# Altium PCB PCB_V0_23_08_01.PcbDoc
Units mm, origin at the board's own origin, x right, y up, seen from the top; angles counter-clockwise.
Board outline 55.24 x 30.1 mm, 2 copper layers (Top Layer, Bottom Layer); 11 components, 6 nets, 90 pads, 0 vias.
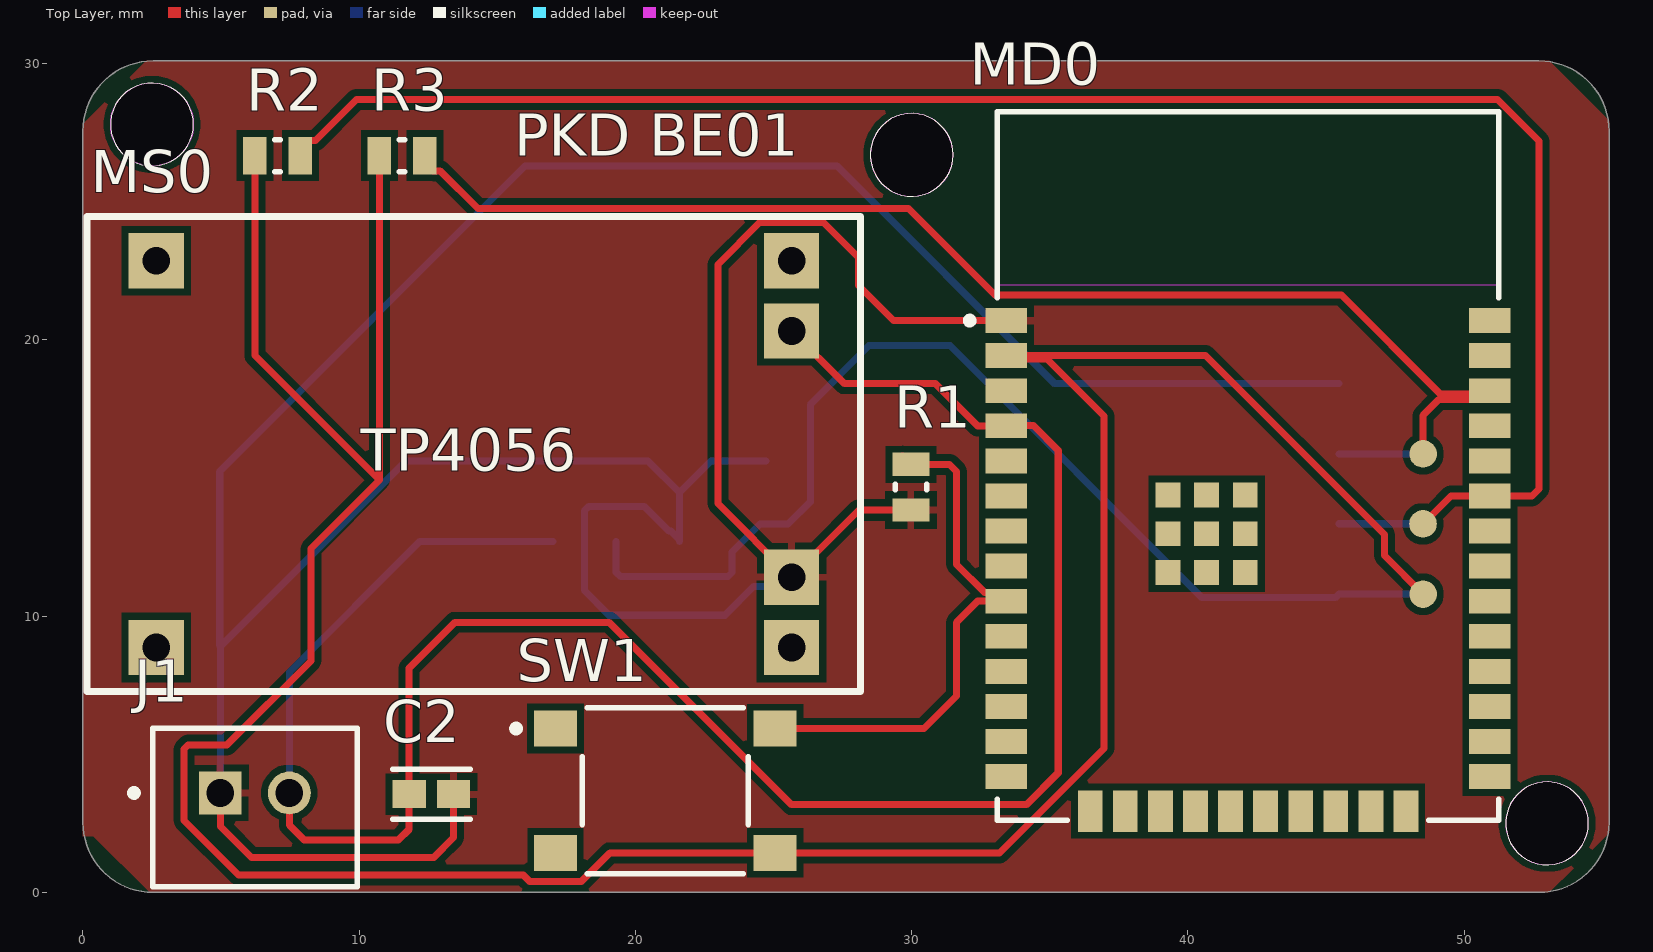
[diagram p0: Top Layer view]
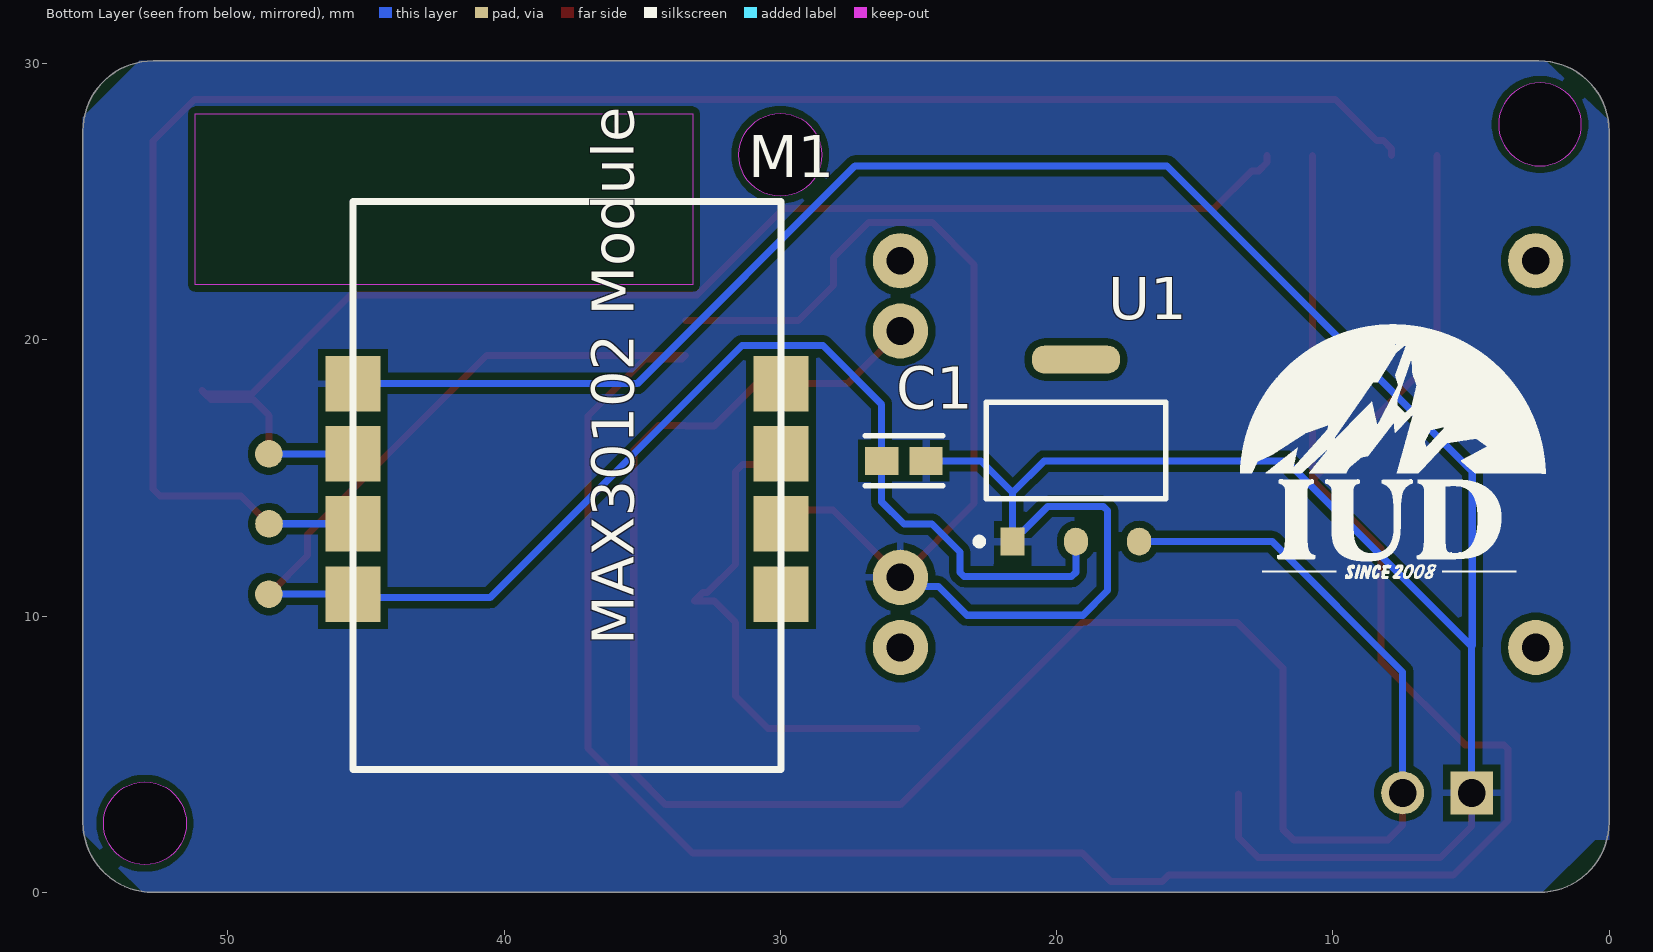
[diagram p1: Bottom Layer view, seen from below]
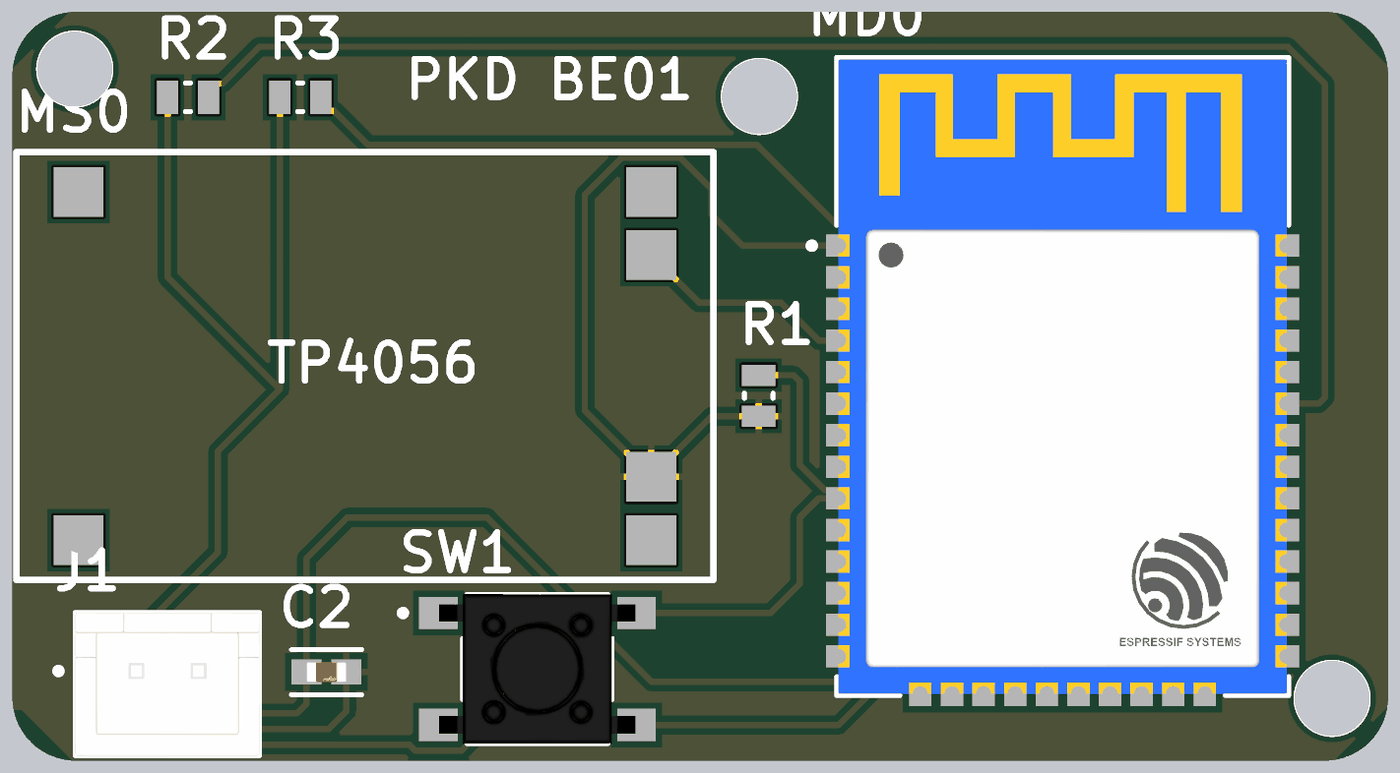
[diagram p2: 3D render of the assembled board from above, using the file's embedded part models]

## Layer stack, top to bottom
Top Solder: solder mask 0.0102, Solder Resist, Dk 3.5
Top Layer: signal copper 0.0356
Dielectric 1: dielectric 0.32, FR-4, Dk 4.8
Bottom Layer: signal copper 0.0356
Bottom Solder: solder mask 0.0102, Solder Resist, Dk 3.5

## Board outline
52.705,30.099 cw(c52.705,27.559) 55.245,27.559 55.245,2.54 cw(c52.705,2.54) 52.705,0 2.54,0 cw(c2.54,2.54) 0,2.54 0,27.559 cw(c2.54,27.559) 2.54,30.099
cut-out: 2.5,26.3 cw(c2.5,27.8) 1,27.8 cw(c2.5,27.8) 2.5,29.3 cw(c2.5,27.8) 4,27.8 cw(c2.5,27.8)
cut-out: 28.5,26.7 ccw(c30,26.7) 30,25.2 ccw(c30,26.7) 31.5,26.7 ccw(c30,26.7) 30,28.2 ccw(c30,26.7)
cut-out: 51.5,2.5 ccw(c53,2.5) 53,1 ccw(c53,2.5) 54.5,2.5 ccw(c53,2.5) 53,4 ccw(c53,2.5)

## Design rules (kind name [scope] priority, off if disabled: settings)
Clearance [All] p1: gap=0.254 ignorepadtopadclearanceinfootprint=FALSE except(0: Arc-Hole Track-Hole SMDPad-Hole THPad-Hole Via-Hole Fill-Hole Poly-Hole Region-Hole Text-Hole)
PolygonConnect [All] p1: connectstyle=Relief reliefconductorwidth=0.254 reliefentries=4 polygonreliefangle="90 Angle" airgapwidth=0.254
RoutingVias [All] p1: holewidth=0.711 width=1.27 viastyle="Through Hole" minholewidth=0.711 minwidth=1.27 maxholewidth=0.711 maxwidth=1.27
SolderMaskExpansion [All] p1: expansion=0.102 istentingtop=FALSE
Width [All] p1: maxlimit=0.254 minlimit=0.254 preferedwidth=0.254
30 further rules are at their usual default settings.

## Components (designator, comment, footprint, x,y, rotation, side; value= is the part's Value field where it differs from the comment)
C1 "GRM188R60J106ME47D" FP-GRM188-0_1-e0_2_0_55-IPC_A 25.527,15.621 r180 bottom
C2 "GRM188R60J106ME47D" FP-GRM188-0_1-e0_2_0_55-IPC_A 12.613,3.556 r0 top
J1 "B2B-XH-A(LF)(SN)" FP-B2B-XH-A_LF_SN-MFG 6.223,3.075 r0 top
M1 "MAX30102" "MAX30102 Module" 29.972,4.445 r90 bottom
MD0 "ESP32-WROOM-32E (16MB)" FP-ESP32-WROOM-32E_16MB-MFG 42.177,15.441 r0 top
MS0 "TP4056" "TP4056 Module" 0.154,7.264 r0 top
R1 "CRCW08050000Z0EA" RESC2013X50X30LL20T20 29.972,14.668 r270 top
R2 "CRCW08050000Z0EA" RESC2013X50X30LL20T20 7.048,26.67 r0 top
R3 "CRCW08050000Z0EA" RESC2013X50X30LL20T20 11.557,26.67 r0 top
SW1 "PTS645SM43SMTR92LFS" FP-PTS645SM43SMTR92LFS-MFG 21.082,3.683 r0 top
U1 "AMS1117-3.3" FP-AMS1117-IPC_C 19.3,15.995 r90 bottom

## Footprints (in the part's own frame and the unit in brackets; to place one, negate y for a bottom-side part, rotate by r counter-clockwise, add the part's x,y. Pads: shape width x height; smd on the part's side, far side on the other; paste and mask are expansions set on the pad)
FP-AMS1117-IPC_C [mm]
  rect 1.004x0.872 smd paste+0 mask+0: 1(-3.295,2.29)
  rrect100% 1.004x0.872 smd paste+0 mask+0: 2(-3.295,0) 3(-3.295,-2.29)
  rrect87% 1.004x3.182 smd paste+0 mask+0: 4(3.295,0)
  silkscreen extent -3.42,-3.25 1.75,3.63, body extent -3.53,-3.25 3.53,3.25, height 1.8
FP-B2B-XH-A_LF_SN-MFG [mm]
  rect 1.55x1.55 hole 1 paste-1000 mask+0: 1(-1.25,0.525)
  round 1.55 hole 1 paste-1000 mask+0: 2(1.25,0.525)
  silkscreen extent -4.5,-2.88 3.7,2.88, body extent -3.8,-2.98 3.8,2.98, height 0.25
FP-ESP32-WROOM-32E_16MB-MFG [mm]
  rect 1.5x0.9 smd paste+0 mask+0: 1(-8.75,5.26) 2(-8.75,3.99) 3(-8.75,2.72) 4(-8.75,1.45) 5(-8.75,0.18) 6(-8.75,-1.09) 7(-8.75,-2.36) 8(-8.75,-3.63) 9(-8.75,-4.9) 10(-8.75,-6.17) 11(-8.75,-7.44) 12(-8.75,-8.71) 13(-8.75,-9.98) 14(-8.75,-11.25) 25(8.75,-11.25) 26(8.75,-9.98) 27(8.75,-8.71) 28(8.75,-7.44) 29(8.75,-6.17) 30(8.75,-4.9) 31(8.75,-3.63) 32(8.75,-2.36) 33(8.75,-1.09) 34(8.75,0.18) 35(8.75,1.45) 36(8.75,2.72) 37(8.75,3.99) 38(8.75,5.26)
  rect 0.9x1.5 smd paste+0 mask+0: 15(-5.715,-12.5) 16(-4.445,-12.5) 17(-3.175,-12.5) 18(-1.905,-12.5) 19(-0.635,-12.5) 20(0.635,-12.5) 21(1.905,-12.5) 22(3.175,-12.5) 23(4.445,-12.5) 24(5.715,-12.5)
  rect 0.9x0.9 smd paste+0 mask+0: 39(-2.9,-3.86) 39(-2.9,-2.46) 39(-2.9,-1.06) 39(-1.5,-3.86) 39(-1.5,-2.46) 39(-1.5,-1.06) 39(-0.1,-3.86) 39(-0.1,-2.46) 39(-0.1,-1.06)
  Keep-Out Layer region: -9,6.56 9,6.56 9,12.75 -9,12.75
  silkscreen extent -10.2,-12.83 9.08,12.83, body extent -9.6,-13.35 9.6,12.93, height 0.25
FP-GRM188-0_1-e0_2_0_55-IPC_A [mm]
  rect 1.208x1.012 smd paste+0 mask+0: 1(-0.802,0) 2(0.802,0)
  silkscreen extent -1.41,-0.91 1.41,0.91, body extent -0.8,-0.4 0.8,0.4, height 0.9
FP-PTS645SM43SMTR92LFS-MFG [mm]
  rect 1.55x1.3 smd paste+0 mask+0: 1(-3.975,2.25) 2(3.975,2.25) 3(-3.975,-2.25) 4(3.975,-2.25)
  silkscreen extent -5.52,-3 3,3, body extent -4.85,-3.1 4.85,3.1, height 0.25
"MAX30102 Module" [mm]
  rect 2x2 smd: 1(6.35,15.5) 2(8.9,15.5) 3(11.43,15.5) 4(13.97,15.5) 5(6.35,0) 6(8.9,0) 7(11.43,0) 8(13.97,0)
  silkscreen extent 0,0 20.56,15.5
RESC2013X50X30LL20T20 [mm] "Chip Resistor, 2-Leads, Body 2.00x1.25mm, IPC High Density"
  rect 0.85x1.35 smd: 1(-0.825,0) 2(0.825,0)
  silkscreen extent -0.1,-0.58 0.1,0.58, body extent -1.1,-0.72 1.1,0.72, height 0.5
"TP4056 Module" [mm]
  rect 2x2 smd: 1(2.5,15.6) 2(2.5,1.6) 3(25.5,15.6) 4(25.5,13.06) 5(25.5,4.14) 6(25.5,1.6)
  silkscreen extent 0,0 28,17.2

## Part data
C1 C2: library part CMP-2006-02792-2, "Chip Multilayer Ceramic Capacitors for General Purpose, 0603, 10uF, X5R, 15%, 20%, 6.3V", Capacitance=10uF, Case Code (Imperial)=0603, Case Code (Metric)=1608, Dielectric=X5R, Max Operating Temperature=85°C, Min Operating Temperature=-55°C, Package Quantity=4000, Tolerance=20%, Voltage=6.3V, Case/Package=0603, Depth=0.8mm, Height=0.8mm, Lead Free="Lead Free", Length=1.6mm, Material=Ceramic, Mount="Surface Mount", Packaging="Tape and Reel", Radiation Hardening=No, REACH SVHC="No SVHC", Termination=SMD/SMT, Thickness=0.035inch, Voltage Rating=6.3V, Voltage Rating (DC)=6.3V, Width=0.031inch
J1: library part CMP-2000-05888-3, "CONN HEADER VERT 2POS 2.5MM", Color=Natural, Contact Resistance=20mR, Current Rating=3A, Housing Color=White, Insulation Resistance=1GR, Max Operating Temperature=85°C, Max Voltage Rating (AC)=250V, Min Operating Temperature=-25°C, Connector Type="Male Pin", Contact Material=Brass, Contact Plating=Tin, Contact Type="Male Pin", Depth=5.75mm, Fastening Type=Detent, Housing Material=Polyamide, Lead Free="Lead Free", Lead Pitch=2.5mm, Length=7.4mm, Max Current Rating=3A, Max Voltage Rating (DC)=250V, Mount="Through Hole", Number of Contacts=2, Number of Positions=2, Number of Rows=1, Orientation=Straight, Packaging=Bulk, Pitch=2.5mm, REACH SVHC="No SVHC", Series=XH, Termination=Solder, Voltage Rating=250V, Voltage Rating (AC)=250V, Wire/Cable Gauge=22AWG
M1 MS0: library part Component_1
MD0: library part CMP-194065-000027-1, "RX TXRX MOD WIFI TRACE ANT SMD"
R1 R2 R3: library part CMP-2001-04896-1, Manufacturer="Vishay Dale", Part Number=CRCW08050000Z0EA
SW1: library part CMP-2000-05160-2, "SWITCH TACTILE SPST-NO 0.05A 12V", Case/Package=SMD/SMT, Color=Black, Contact Resistance=100mR, Current Rating=50mA, Max Operating Temperature=60°C, Max Voltage Rating (DC)=12V, Min Operating Temperature=-20°C, Operating Force=160gf, Package Quantity=1, Actuator Length=0.85mm, Actuator Material=Nylon, Actuator Type=Standard, Contact Material=Silver, Contact Plating=Silver, Depth=9mm, Illumination Type=Non-Illuminated, Lead Free="Lead Free", Length=6mm, Max Current Rating=50mA, Mechanical Life=100000Cycles, Mount="Surface Mount", Orientation=Straight, Packaging="Tape and Reel", REACH SVHC="No SVHC", Switch Function=Off-Mom, Termination="Gull Wing", Throw Configuration=SPST, Voltage Rating (DC)=12V
U1: library part CMP-209535-000001-1, "LDO Voltage Regulators 1A, 3.3V", Dropout Voltage=1.1V, Manufacturer="Advanced Monolithic Systems", Max Junction Temp=+125°C, Max Power Dissipation=1.2W, Max Supply Voltage=15V, Nominal Supply Current=5mA, Output Current=1A, Output Voltage=3.3V, Package=AMS1117, Temperature="-40°C to +125°C", Temperature Range Low=-40°C, Automotive=No, Category=IC, ComponentLink2Description=Datasheet, ComponentLink2URL=http://www.advanced-monolithic.com/pdf/ds1117.pdf, Device Class L1="Integrated Circuits (ICs)", Device Class L2="Power Management ICs", Device Class L3="Voltage Regulators - Linear", Height=1.8mm, Ipc Land Pattern Name=SOT229P700X180-4, Lead Free=Yes, Manufacturer Part Number=AMS1117-3.3, Number Of Outputs=1, Octopart=https://octopart.com/ams1117-3.3-advanced+monolithic+systems-25899300, Output Type=Fixed, RoHS=TRUE, Standoff Height=0.64mm, Temperature Range High=+125°C

## Free pads (board coordinates)
  round 1 all layers, no hole: 2(48.514,15.875) 3(48.509,13.34) 11(48.514,10.795)
  round 2 hole 1: 4(25.654,11.404) 6(25.654,8.864) 7(25.654,22.864) 8(2.654,22.864) 9(2.654,8.864) 10(25.654,20.324)

## Nets (pads, with @x,y where several pads share a name; then routed paths per layer and width w, separated by ;. In a path a pad name is that pad's centre, name@x,y a point inside that pad or via, vN(x,y) a via of type N, cw(c..) or ccw(c..) an arc to the next point about the centre after c; other vN are vias at no path point)
NetC1_1: C1.1 M1.1 MD0.2 pad.11 R2.1 R3.1 SW1.4 U1.2 | length 153.4
  Top Layer w0.254: R2.1 6.223,19.431 10.732,14.922 ; R3.1 10.732,14.922 ; pad.11 47.117,12.192 47.117,12.954 40.64,19.431 MD0.2 33.554,19.304 34.903,19.304 36.957,17.25 36.957,5.207 33.183,1.433 SW1.4 19.071,1.433 18.04,0.402 16.174,0.402 15.941,0.635 5.632,0.635 3.661,2.605 3.661,5.185 3.81,5.334 5.207,5.334 8.255,8.382 8.255,12.445 10.732,14.922
  Bottom Layer w0.254: U1.2 19.304,12.696 19.304,11.579 19.453,11.43 23.346,11.43 23.495,11.579 23.495,12.319 24.511,13.335 25.527,13.335 26.329,14.137 26.329,17.663 28.461,19.796 31.385,19.796 40.513,10.668 45.345,10.668 M1.1 pad.11
NetC1_2: C1.2 C2.2 J1.1 M1.4 MD0.1 MS0.5 pad.4 R1.2 U1.1 | length 143.5
  Top Layer w0.254: J1.1 4.973,2.393 6.096,1.27 12.7,1.27 13.415,1.985 C2.2 ; R1.2 28.093,13.843 MS0.5 22.987,14.071 22.987,22.736 24.496,24.245 26.812,24.245 28.074,22.983 28.074,21.964 29.337,20.701 MD0.1
  Bottom Layer w0.254: J1.1 4.973,8.91 ; U1.1 U1.1@21.59,12.766 ; C1.2 22.733,15.621 21.59,14.478 ; pad.4 25.32,11.07 24.278,11.07 23.241,10.033 19.05,10.033 18.161,10.922 18.161,13.821 18.31,13.97 20.32,13.97 21.215,13.075 21.281,13.075 U1.1@21.59,12.766 ; M1.4 35.179,18.415 27.305,26.289 16.002,26.289 4.953,15.24 4.953,8.93 4.973,8.91 ; 4.973,8.91 11.684,15.621 20.447,15.621 21.59,14.478 ; U1.1@21.59,12.766 21.59,14.478
NetC2_1: C2.1 J1.2 MD0.4 MS0.4 pad.10 U1.3 | length 78.1
  Top Layer w0.254: J1.2 7.473,2.433 8.001,1.905 11.43,1.905 11.811,2.286 C2.1 11.811,8.128 13.462,9.779 19.05,9.779 25.654,3.175 34.15,3.175 35.306,4.331 35.306,16.002 34.409,16.899 33.435,16.899 MD0.4 32.385,16.891 30.861,18.415 27.563,18.415 MS0.4
  Bottom Layer w0.254: J1.2 7.473,7.981 12.192,12.7 U1.3
NetM1_2: M1.2 MD0.33 pad.3 R2.2 | length 66.8
  Top Layer w0.254: R2.2 7.873,26.92 8.171,27.218 8.421,27.218 9.905,28.702 51.205,28.702 52.705,27.202 52.705,14.605 52.451,14.351 MD0.33 49.52,14.351 pad.3
  Bottom Layer w0.254: M1.2 48.504,13.345 pad.3@48.514,13.335
NetM1_3: M1.3 MD0.36 pad.2 R3.2 | length 49.4
  Top Layer w0.254: R3.2 12.382,26.42 12.68,26.122 12.93,26.122 14.299,24.753 29.886,24.753 33.019,21.62 45.563,21.62 49.149,18.034 MD0.36@50.8,18.034 ; pad.2 48.514,17.272 49.08,17.838 50.604,17.838 MD0.36@50.8,18.034 ; MD0.36 MD0.36@50.8,18.034
  Bottom Layer w0.254: M1.3 pad.2
NetMD0_9: MD0.9 R1.1 SW1.2 | length 19.1
  Top Layer w0.254: SW1.2 30.444,5.933 31.623,7.112 31.623,9.779 32.385,10.541 33.102,10.541 33.102,10.566 32.804,10.864 32.635,10.864 31.623,11.876 31.623,15.24 31.37,15.493 R1.1 R1.1@29.674,15.791
pads on no net: M1.5 M1.6 M1.7 M1.8 MD0.3 MD0.5 MD0.6 MD0.7 MD0.8 MD0.10 MD0.11 MD0.12 MD0.13 MD0.14 MD0.15 MD0.16 MD0.17 MD0.18 MD0.19 MD0.20 MD0.21 MD0.22 MD0.23 MD0.24 MD0.25 MD0.26 MD0.27 MD0.28 MD0.29 MD0.30 MD0.31 MD0.32 MD0.34 MD0.35 MD0.37 MD0.38 MD0.39 MS0.1 MS0.2 MS0.3 MS0.6 SW1.1 SW1.3 U1.4

## Polygon pours and split planes (outlines as drawn)
NetC1_2 on Top Layer "NETC1_2_L01_P003" (solid, remove dead copper, pour order 3): 53.086,30.099 55.245,27.94 55.245,2.159 53.086,0 2.413,0 0.381,2.032 0,2.032 0,27.813 2.286,30.099
NetC1_2 on Bottom Layer "NETC1_2_L02_P004" (solid, remove dead copper, pour order 4): 2.286,30.099 53.213,30.099 55.245,28.067 55.245,2.159 53.086,0 2.413,0 0.508,1.905 0,1.905 0,27.94

## Silkscreen, mask and mechanical layers (free items; w line width, h text height)
Top Overlay:
  circle w0: c30,26.7 r1.5
  circle w0: c53,2.5 r1.5
  circle w0: c2.5,27.8 r1.5
  text "PKD BE01" at 15.621,26.67 h1.52
Bottom Overlay:
  drawing of 17 lines, arcs and shapes, not listed

## Text inside footprints (layer, text, board x,y; h text height)
M1: Bottom Overlay "MAX30102 Module" at 35.306,8.954 h1.52 r270